# Altium PCB PCB1_Pt100.PcbDoc (part 2 of 2)
Units mm, origin at the board's own origin, x right, y up, seen from the top; angles counter-clockwise.
Board outline 125.73 x 96.9 mm, 2 copper layers (Top Layer, Bottom Layer); 98 components, 73 nets, 365 pads, 113 vias.
Unrouted connection lines stored in the file: 47.
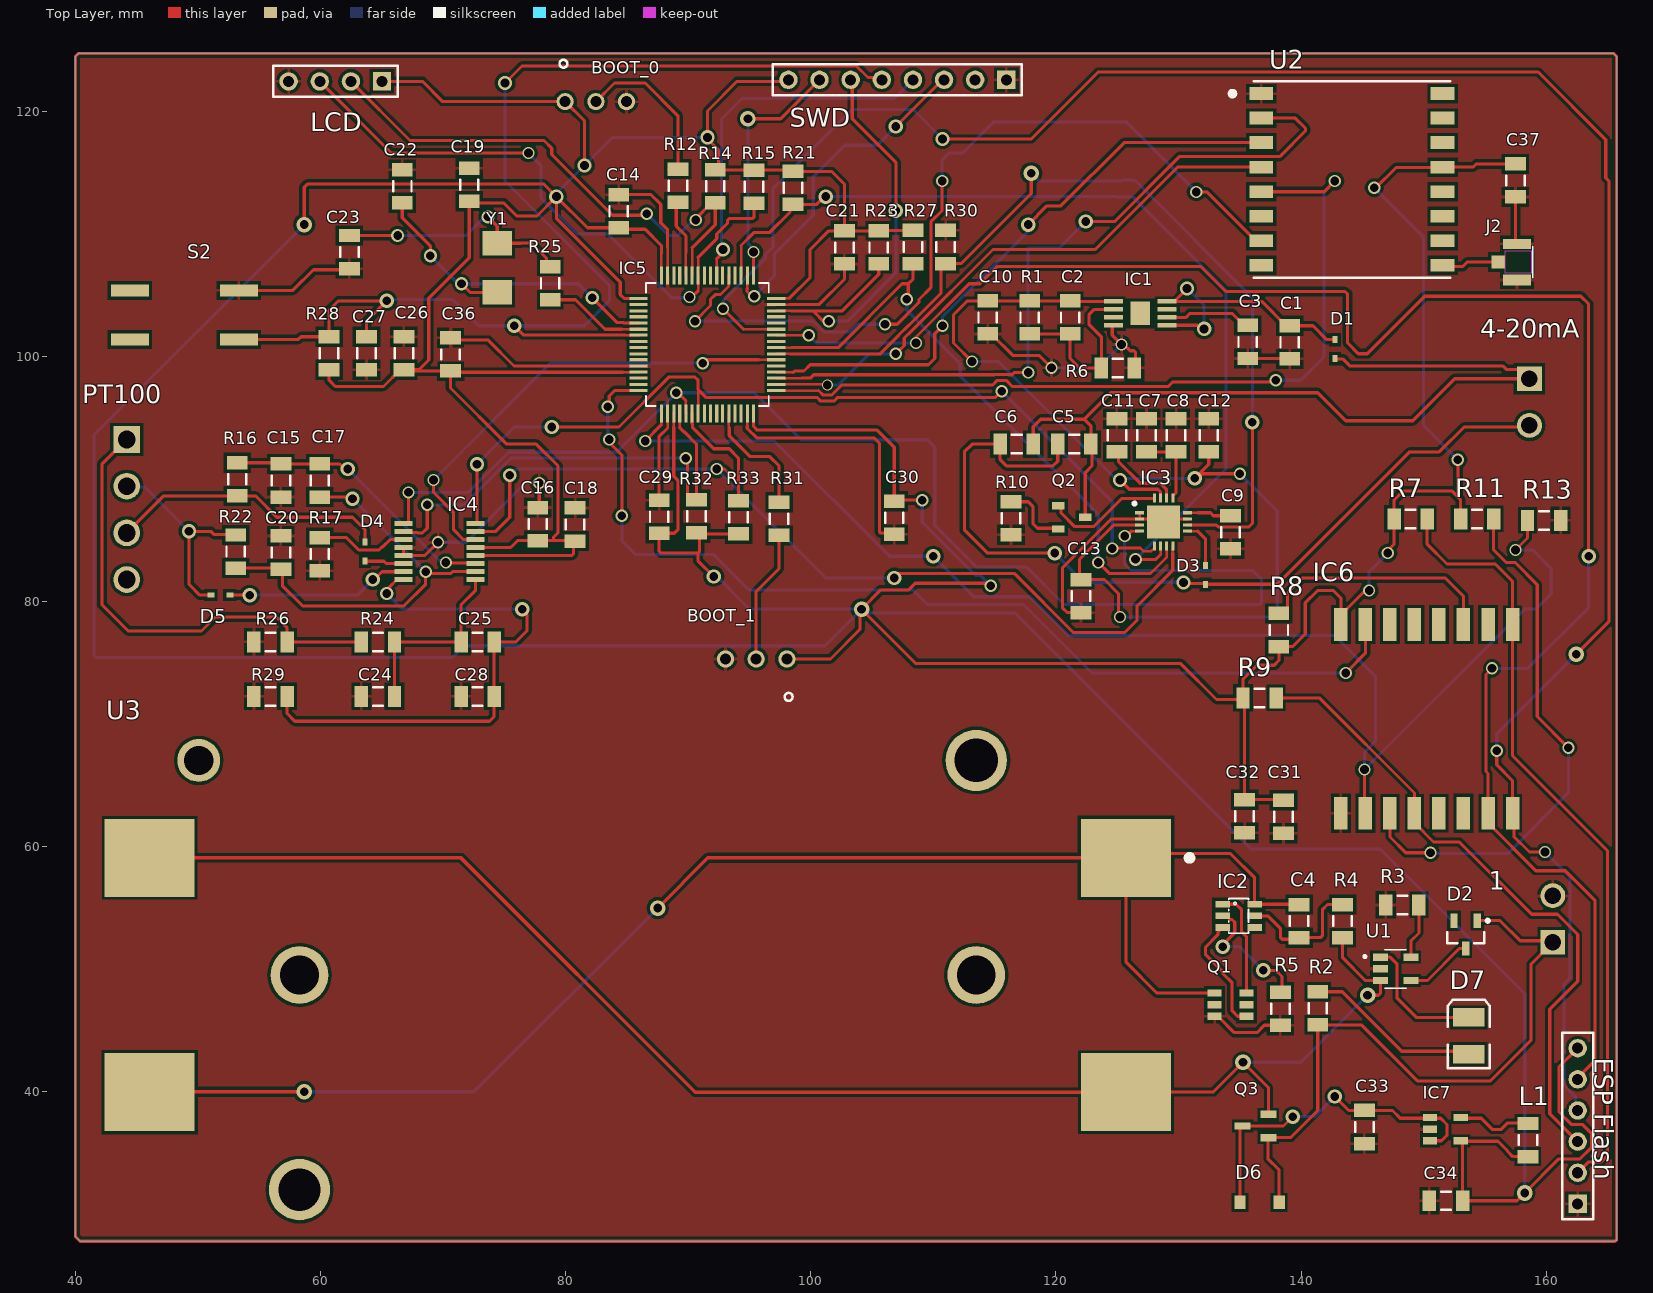
[diagram p0: Top Layer view]

## Via types
v1: diameter 1, hole 0.711, Top Layer to Bottom Layer, 58 vias
v2: diameter 1.17, hole 0.711, Top Layer to Bottom Layer, 36 vias
v3: diameter 1.27, hole 0.711, Top Layer to Bottom Layer, 10 vias
v4: diameter 1.07, hole 0.711, Top Layer to Bottom Layer, 8 vias
v5: diameter 0.9, hole 0.7, Top Layer to Bottom Layer, 1 vias

## Nets (pads, with @x,y where several pads share a name; then routed paths per layer and width w, separated by ;. In a path a pad name is that pad's centre, name@x,y a point inside that pad or via, vN(x,y) a via of type N, cw(c..) or ccw(c..) an arc to the next point about the centre after c; other vN are vias at no path point) (continued)
NetIC5_50: (continued)
  Bottom Layer w0.254: v1(95.377,104.902) 97.028,106.553 97.028,108.331 100.203,111.506 100.203,114.659 102.765,117.221 105.41,117.221 v2(106.934,118.745)
NetIC5_53: IC5.53 U2.7 | length 68.5
  Top Layer w0.21: 92.629,105.029 93.318,105.718 IC5.53@93.318,106.576
  Top Layer w0.254: v1(90.551,102.87) 91.821,104.14 91.821,104.648 92.202,105.029 92.629,105.029 ; IC5.53@93.318,106.576 IC5.53 ; v1(106.045,102.616) 107.037,102.616 108.831,104.41 108.831,104.64 109.791,105.6 109.791,110.967 110.713,111.889 v1(110.713,114.3) ; v1(131.445,113.411) 132.311,113.411 136.295,109.427 U2.7
  Bottom Layer w0.254: v1(90.551,102.87) 100.179,102.87 101.06,101.989 103.138,101.989 103.765,102.616 v1(106.045,102.616) ; v1(110.713,114.3) 110.713,116.025 111.274,116.586 112.395,116.586 114.935,119.126 125.73,119.126 v1(131.445,113.411)
NetIC5_55: IC5.55 SWD.4 | length 29.8
  Top Layer w0.21: IC5.55 92.329,107.956
  Top Layer w0.254: 92.329,107.956 92.837,108.464 v2(92.837,108.712)
  Bottom Layer w0.254: v2@92.71,108.839 92.71,119.358 94.383,121.031 106.807,121.031 SWD.4
NetIC5_58: IC5.58 LCD.3 R15.1 | length 49.6
  Top Layer w0.21: 90.805,105.335 IC5.58 ; IC5.58@90.806,107.188 90.806,108.078
  Top Layer w0.254: LCD.3 65.786,116.586 v1(76.962,116.586) ; v1(90.106,104.838) 90.308,104.838 90.805,105.335 ; 90.806,108.078 92.329,109.601 92.329,109.982 93.218,110.871 93.218,111.103 93.367,111.252 95.25,111.252 95.377,111.379 R15.1
  Bottom Layer w0.254: v1(76.962,116.586) 77.976,115.572 77.976,112.936 80.93,109.982 83.439,109.982 88.646,104.775 90.043,104.775 v1(90.106,104.838) v1@90.17,104.902
NetIC5_59: IC5.59 LCD.2 R14.1 | length 43.3
  Top Layer w0.21: IC5.59 90.322,108.864
  Top Layer w0.254: LCD.2 67.31,117.602 78.232,117.602 78.867,116.967 78.867,116.459 83.82,111.506 86.36,111.506 v1@86.614,111.252 ; 90.322,108.864 92.202,110.744 R14.1 91.902,112.522 90.614,111.234 v1(90.614,111.125)
  Bottom Layer w0.254: v1(86.614,111.633) 88.392,109.855 89.154,109.855 90.424,111.125 v1(90.614,111.125)
NetIC5_60: IC5.60 R12.1 | length 6.4
  Top Layer w0.21: IC5.60 89.814,108.433
  Top Layer w0.254: R12.1@88.646,112.489 89.027,112.108 89.027,110.617 89.814,109.83 89.814,108.433
NetIC6_3: IC6.3 R8.2 | length 19.9
  Top Layer w0.254: R8.2 138.476,79.027 138.899,79.45 138.899,80.733 140.081,81.915 151.765,81.915 153.241,80.439 IC6.3
NetIC6_11: IC6.11 R11.2 | length 44.5
  Top Layer w0.254: IC6.11 147.241,60.785 148.526,59.499 v1(150.558,59.499) ; R11.2 155.702,84.201 156.71,83.193 157.441,83.193 159.258,81.376 159.258,70.612 v1(161.798,68.072)
  Bottom Layer w0.254: v1@150.495,59.563 v1(150.558,59.499) 150.622,59.436 156.845,59.436 161.798,64.389 v1(161.798,68.072)
NetIC7_5: IC7.5 L1.2 | length 6.1
  Top Layer w0.254: IC7.5 153.076,37.846 154.686,37.846 155.591,36.941 156.321,36.941 156.845,37.465 158.449,37.465 L1.2
NetJ2_3: J2.3 U2.9 | length 4.7
  Top Layer w0.254: U2.9 151.657,107.315 153.162,107.315 153.543,107.696 J2.3
NetPT100_1: PT100.1 R24.2 R26.2 | length 39.1
  Top Layer w0.254: PT100.1@44.196,92.456 PT100.1 42.164,91.186 42.164,79.756 44.323,77.597 50.292,77.597 51.435,78.74 56.388,78.74 57.277,77.851 R26.2 R24.2
NetQ2_2: Q2.2 R10.1 | length 5.7
  Top Layer w0.254: R10.1@116.379,88.185 R10.1 117.729,88.138 118.11,87.757 118.11,86.36 118.491,85.979 120.124,85.979 Q2.2
NetR3_2: R3.2 U1.5 | length 4.5
  Top Layer w0.254: U1.5 148.946,52.299 149.606,52.959 R3.2
Vbat: Q3.2 R4.1 U1.3 U3.2 U3.4 | length 123.3
  Top Layer w0.254: U3.4 132.812,39.975 v3(135.255,42.418) 137.321,40.352 Q3.2 ; R4.1 143.383,50.927 145.222,49.088 U1.3 146.456,48.028 146.307,47.879 v3(145.415,47.879)
  Top Layer w0.28: 90.581,39.975 U3.4
  Top Layer w0.3: U3.2 71.471,59.085 90.581,39.975
  Bottom Layer w0.254: v3(135.255,42.418) 139.954,42.418 v3(145.415,47.879)
VCC: C2.2 C10.2 C12.2 C13.2 IC1.1 IC3.3 IC3.15 R1.2 | length 89.6
  Top Layer w0.254: v1(113.157,99.568) 111.633,101.092 111.633,103.378 112.776,104.521 C10.2 R1.2 C2.2 121.199,104.48 IC1.1 ; C13.2 C13.2@122.174,81.788 ; v1(125.222,78.74) 125.095,78.867 125.095,80.645 123.952,81.788 C13.2@122.174,81.788 ; v2(125.222,89.916) 125.979,89.159 128.301,89.159 128.521,88.939 128.521,88.429 IC3.15@128.528,88.422 ; IC3.3@126.843,86.237 124.718,86.237 121.92,83.439 121.92,82.042 C13.2@122.174,81.788 ; C12.2 132.461,91.186 v2(131.318,90.043) 131.566,90.043 131.947,90.424 v1(135.001,90.424)
  Bottom Layer w0.254: v1(113.157,99.568) 115.316,99.568 124.968,89.916 v2(125.222,89.916) 125.349,90.043 v2(131.318,90.043) ; v1(125.222,78.74) 137.414,78.74 138.049,79.375 138.049,87.376 v1(135.001,90.424)
pads on no net: D2.2 IC1.3 IC1.7 IC1.9 IC2.4 IC5.2 IC5.3 IC5.4 IC5.8 IC5.9 IC5.10 IC5.11 IC5.14 IC5.15 IC5.24 IC5.25 IC5.26 IC5.27 IC5.29 IC5.30 IC5.37 IC5.41 IC5.44 IC5.45 IC5.52 IC5.54 IC5.56 IC5.57 IC5.61 IC5.62 IC6.2 IC6.4 IC6.5 IC6.6 IC6.13 IC6.14 PT100.4 Q1.2 Q1.5 S2.3 S2.4 SWD.2 U2.6 U2.8 U2.10 U2.11 U2.12 U2.14 U2.15 U2.16 U3.5 U3.6 U3.7 U3.8 U3.9
copper on no net: | length 444.7
  Top Layer w0.254: 40.005,28.194 40.005,124.46 40.259,124.714 165.481,124.714 165.735,124.46 165.735,27.94 165.608,27.813 40.386,27.813 40.005,28.194

## Polygon pours and split planes (outlines as drawn)
GND on Top Layer "Top Layer-No Net" (solid, pour order 2): 40.005,28.194 40.005,124.46 40.259,124.714 165.481,124.714 165.735,124.46 165.735,27.94 165.608,27.813 40.386,27.813
GND on Bottom Layer "Top Layer-No Net1" (solid, pour order 3): 40.005,28.194 40.005,124.46 40.259,124.714 165.481,124.714 165.735,124.46 165.735,27.94 165.608,27.813 40.386,27.813